# Altium PCB dl380_fan_mod.PcbDoc
Units mm, origin at the board's own origin, x right, y up, seen from the top; angles counter-clockwise.
Board outline 20 x 10 mm, 2 copper layers (Top Layer, Bottom Layer); 20 components, 15 nets, 55 pads, 36 vias.
Unrouted connection lines stored in the file: 19.
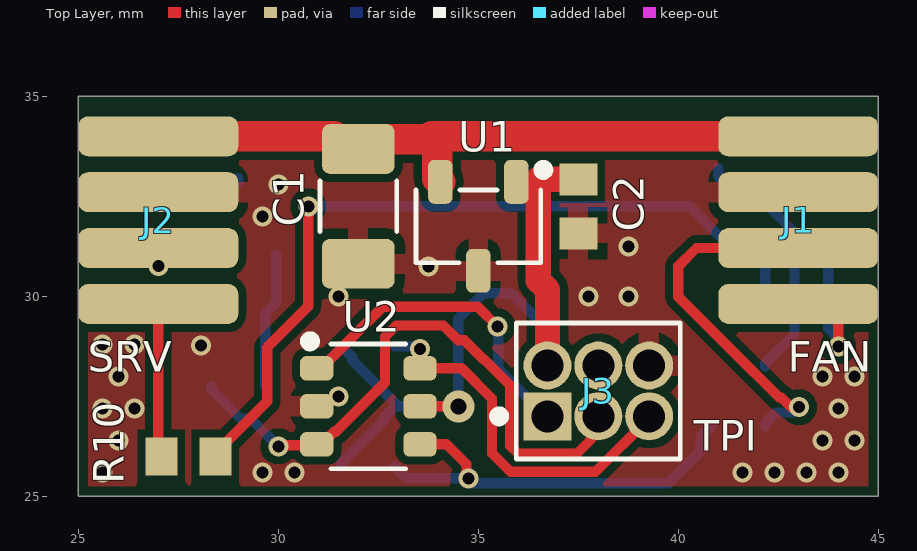
[diagram p0: Top Layer view]
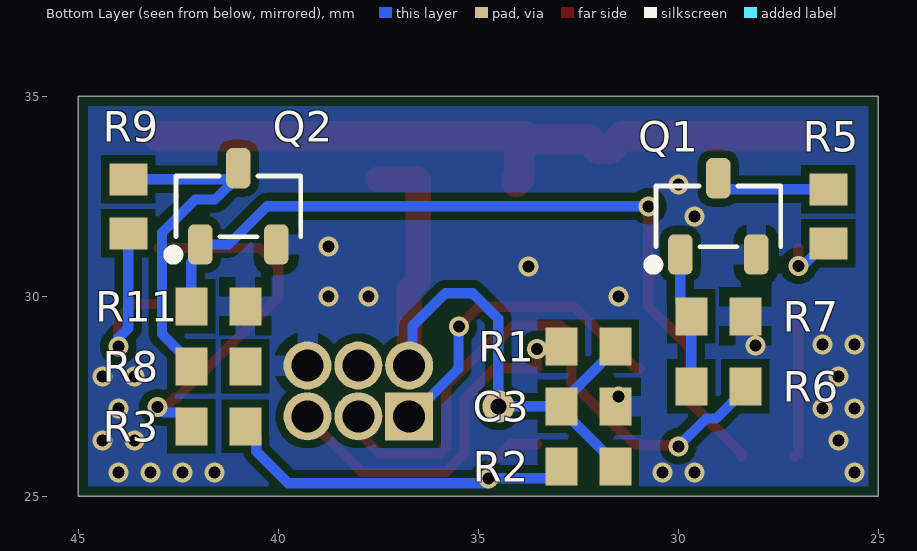
[diagram p1: Bottom Layer view, seen from below]
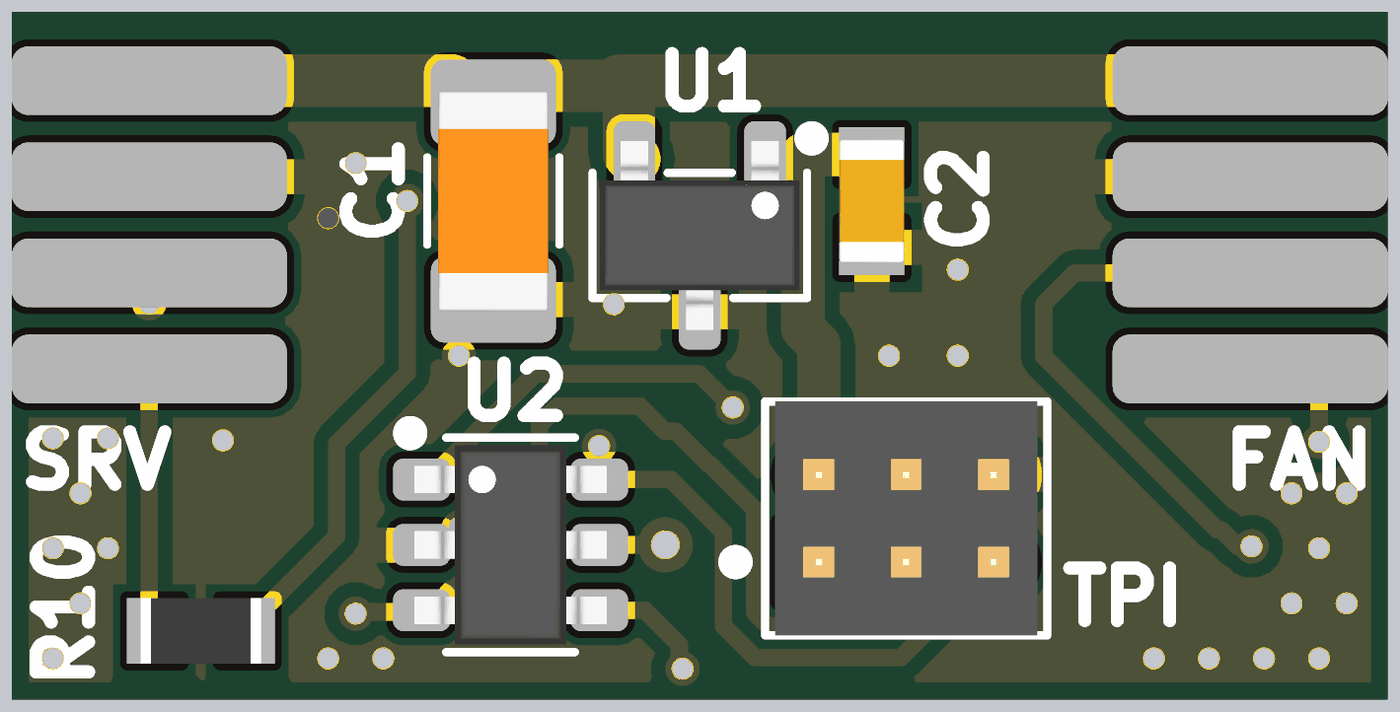
[diagram p2: 3D render of the assembled board from above, using the file's embedded part models]
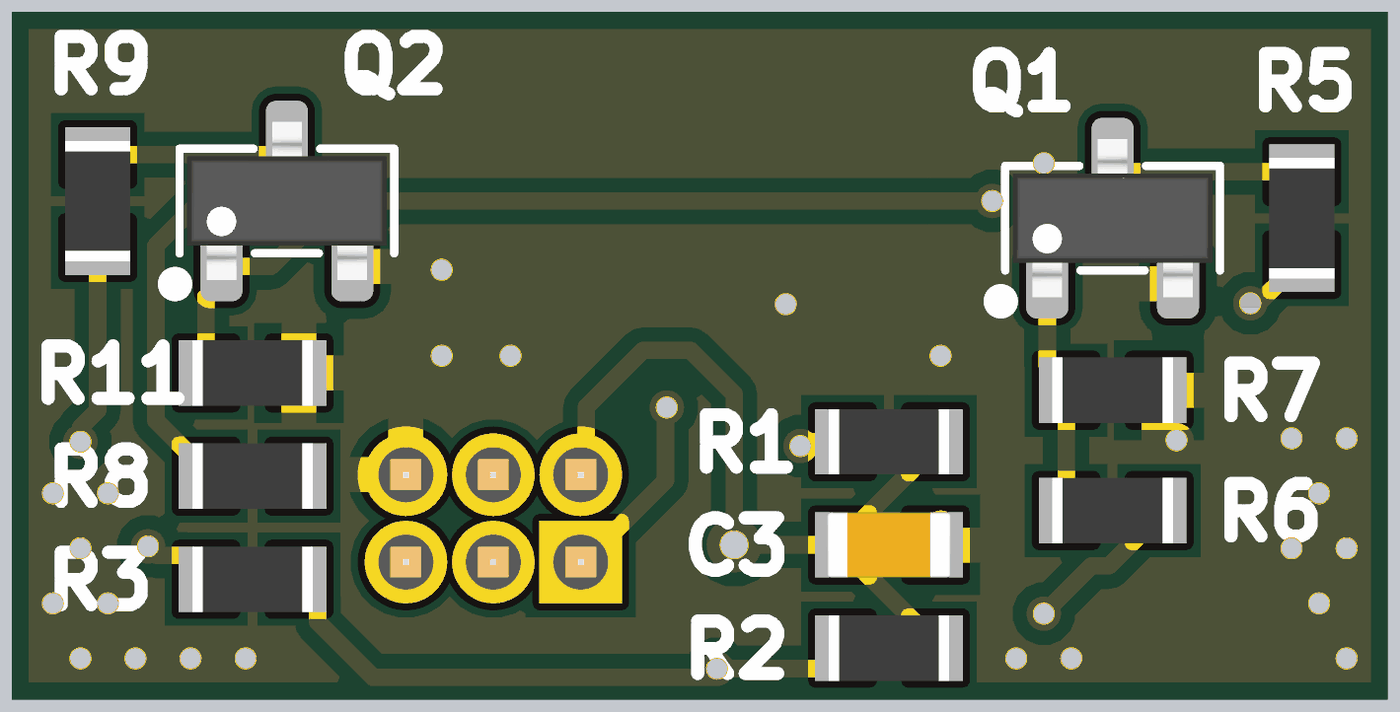
[diagram p3: 3D render of the assembled board from below, using the file's embedded part models]

## Layer stack, top to bottom
Top Solder: solder mask 0.0102, Solder Resist, Dk 3.5
Top Layer: signal copper 0.0356
Dielectric 1: dielectric 0.32, FR-4, Dk 4.8
Bottom Layer: signal copper 0.0356
Bottom Solder: solder mask 0.0102, Solder Resist, Dk 3.5

## Board outline
25,25 45,25 45,35 25,35

## Design rules (kind name [scope] priority, off if disabled: settings)
BoardOutlineClearance [All] p1: gap=0.2 ignorepadtopadclearanceinfootprint=FALSE except(0.4: Arc-SplitBarrior Arc-SplitContinuation Track-SplitBarrior Track-SplitContinuation SMDPad-SplitBarrior SMDPad-SplitContinuation THPad-SplitBarrior THPad-SplitContinuation Via-SplitBarrior Via-SplitContinuation Fill-SplitBarrior Fill-SplitContinuation Poly-SplitBarrior Poly-SplitContinuation Region-SplitBarrior Region-SplitContinuation Text-SplitBarrior Text-SplitContinuation)
Clearance "Clearance Bottom Layer" [OnLayer('Bottom Layer')] p1: gap=0.203 ignorepadtopadclearanceinfootprint=TRUE except(0.254: Arc-Text Track-Text SMDPad-Text THPad-Text Via-Text Fill-Text Poly-Text Region-Text Text-Text)
Clearance "Clearance Top Layer" [OnLayer('Top Layer')] p2: gap=0.203 ignorepadtopadclearanceinfootprint=TRUE except(0.254: Arc-Text Track-Text SMDPad-Text THPad-Text Via-Text Fill-Text Poly-Text Region-Text Text-Text)
Clearance [All] p3: gap=0.2 ignorepadtopadclearanceinfootprint=FALSE except(0.089: Arc-Arc Arc-Track Arc-SMDPad Track-Track Track-SMDPad SMDPad-SMDPad; 0.127: Arc-Via Track-Via SMDPad-Via THPad-Via Via-Via; 0.254: Arc-Text Track-Text SMDPad-Text THPad-Text Via-Text Fill-Text Poly-Text Region-Text Text-Text)
HoleSize [All] p1: absolutevalues=TRUE maxlimit=6.3 minlimit=0.2 maxpercent=80.000 minpercent=20.000
MinimumAnnularRing [All] p1: minimumring=0.076
MinimumSolderMaskSliver [All] p1: minsoldermaskwidth=0.1
PolygonConnect PolygonConnect_1 [All] p1: thpad.connectstyle=Relief thpad.reliefconductorwidth=0.508 thpad.reliefentries=4 thpad.polygonreliefangle="90 Angle" thpad.airgapwidth=0.254 smdpad.connectstyle=Relief smdpad.reliefconductorwidth=0.508 smdpad.reliefentries=4 smdpad.polygonreliefangle="90 Angle" smdpad.airgapwidth=0.254 via.connectstyle=Direct via.reliefconductorwidth=0.508 via.reliefentries=4 via.polygonreliefangle="90 Angle" via.airgapwidth=0.254
RoutingCorners [All] p1: cornerstyle=Round minsetback=2.54 maxsetback=2.54
RoutingVias [All] p1: holewidth=0.5 width=1 viastyle="Through Hole" minholewidth=0.2 minwidth=0.45 maxholewidth=1 maxwidth=2
SilkToSilkClearance [All] p1: silktosilkclearance=0.1
SilkToSolderMaskClearance [IsPad] p1: minsilkscreentomaskgap=0.1 clearancetoexposedcopper=TRUE
SolderMaskExpansion SolderMaskExpansion_Via [IsVia] p1: expansion=0.102 istentingtop=TRUE
SolderMaskExpansion [All] p2: expansion=0.102 istentingtop=FALSE
SupplyNets "Schematic Supply Nets_2" [InNet('+12')] p1: voltage=0.000
SupplyNets "Schematic Supply Nets_1" [InNet('GND')] p2: voltage=0.000
SupplyNets "Schematic Supply Nets" [InNet('+5')] p3: voltage=0.000
Width [All] p1: maxlimit=2.54 minlimit=0.089 preferedwidth=0.381
25 further rules are at their usual default settings.

## Components (designator, comment, footprint, x,y, rotation, side; value= is the part's Value field where it differs from the comment)
C1 "330n" CAPC320X160X180L55N 32,32.25 r90 top
C2 "100n" CAPC1608X08N 37.5,32.25 r90 top
C3 "100n" CAPC1608X08N 32.25,27.25 r0 bottom
J1 "FAN" 4x_PAD_4x1 43,34 r0 top locked
J2 "SRV" 4x_PAD_4x1 27,34 r0 top locked
J3 "TPI" HDRV6W40P127_3X2_381X340H570 36.73,27 r0 top locked
Q1 "MOSFET-N" SOT23-3P95_230X110L30X43N 29,32 r180 bottom
Q2 "MOSFET-N" SOT23-3P95_230X110L30X43N 41,32.25 r180 bottom
R1 "10k" RESC1608X06N 32.25,28.75 r180 bottom
R2 "10k" RESC1608X06N 32.25,25.75 r180 bottom
R3 "100R" RESC1608X06N 41.5,26.75 r180 bottom
R5 "100R" RESC1608X06N 26.25,32 r90 bottom
R6 "100R" RESC1608X06N 29,27.75 r180 bottom
R7 "1M0" RESC1608X06N 29,29.5 r0 bottom
R8 "10k" RESC1608X06N 41.5,28.25 r0 bottom
R9 "100R" RESC1608X06N 43.75,32.25 r90 bottom
R10 "100R" RESC1608X06N 27.75,26 r180 top
R11 "1M0" RESC1608X06N 41.5,29.75 r0 bottom
U1 "TS78L05CX" SOT23-3P95_275X135L45X40N 35,31.75 r180 top
U2 "ATTINY9-TS" SOT23-6P95_280X145L42X40N 32.25,27.25 r270 top locked

## Footprints (in the part's own frame and the unit in brackets; to place one, negate y for a bottom-side part, rotate by r counter-clockwise, add the part's x,y. Pads: shape width x height; smd on the part's side, far side on the other; paste and mask are expansions set on the pad)
4x_PAD_4x1 [mm] "4 Pads, 4x1mm"
  rrect50% 4x1 smd: 1(0,0) 2(0,-1.397) 3(0,-2.794) 4(0,-4.191)
CAPC320X160X180L55N [mm] "Capacitor, Chip; 3.20 mm L X 1.60 mm W X 1.80 mm H body"
  rrect32% 1.246x1.815 smd: 1(-1.435,0) 2(1.435,0)
  silkscreen extent -0.63,-0.96 0.63,0.96, body extent -1.6,-0.8 1.6,0.8, height 1.8
CAPC1608X08N [mm] "Chip Capacitor, 2-Leads, Body 1,60x0,80mm, IPC Medium Density"
  rect 0.8x0.95 smd: 1(-0.675,0) 2(0.675,0)
  body extent -0.9,-0.47 0.9,0.48, height 0.85
HDRV6W40P127_3X2_381X340H570 [mm] "Header, Vertical Non-Shrouded, 1.27 mm pitch; 0.45 mm lead width, 6 pin, 2 rows, 3.81 mm L X 3.40 mm W X 5.70 mm H body"
  rect 1.2x1.2 / inner round 1.2 / far side rect 1.2x1.2 hole 0.8 paste-2539.97: 1(0,0)
  round 1.2 hole 0.8 paste-2539.97: 2(0,1.27) 3(1.27,0) 4(1.27,1.27) 5(2.54,0) 6(2.54,1.27)
  silkscreen extent -1.33,-1.06 3.32,2.33, body extent -0.64,-1.06 3.17,2.33, height 5.7
RESC1608X06N [mm] "Chip Resistor, 2-Leads, Body 1,60x0,85mm, IPC Medium Density"
  rect 0.8x0.95 smd: 1(-0.675,0) 2(0.675,0)
  body extent -0.87,-0.48 0.87,0.48, height 0.55
SOT23-3P95_230X110L30X43N [mm] "Small Outline Transistor, SOT-23 Type, 0.95 mm pitch; 3 pin, 2.90 mm L X 1.30 mm W X 1.10 mm H body"
  rrect50% 0.61x1.009 smd: 1(-0.95,-0.953) 2(0.95,-0.953) 3(0,0.953)
  silkscreen extent -1.75,-1.33 1.56,0.76, body extent -1.45,-1.15 1.45,1.15, height 1.1
SOT23-3P95_275X135L45X40N [mm] "Small Outline Transistor, SOT-23 Type, 0.95 mm pitch; 3 pin, 2.90 mm L X 1.60 mm W X 1.35 mm H body"
  rrect50% 0.609x1.096 smd: 1(-0.95,-1.112) 2(0.95,-1.112) 3(0,1.112)
  silkscreen extent -1.75,-1.53 1.56,0.91, body extent -1.45,-1.38 1.45,1.38, height 1.35
SOT23-6P95_280X145L42X40N [mm] "Microchip 6ST1, Small Outline Transistor, SOT-23 Type, 0.95 mm pitch; 6 pin, 2.90 mm L X 1.625 mm W X 1.45 mm H body"
  rrect50% 0.609x0.833 smd: 1(-0.95,-1.291) 2(0,-1.291) 3(0.95,-1.291) 4(0.95,1.291) 5(0,1.291) 6(-0.95,1.291)
  silkscreen extent -1.75,-1.58 1.56,0.93, body extent -1.45,-1.4 1.45,1.4, height 1.45

## Part data
C1: library part cap_330n_1206, "Capacitor SMD 1206, 330n", Reference=cap_330n_1206
C2 C3: library part cap_100n_0603, "Capacitor SMD 0603, 100n", Reference=cap_100n_0603
J1 J2: library part 4x_PAD_4x1, "4x_PAD_4x1", Reference=4x_PAD_4x1
J3: library part HDR_2x3_50mil, "2x3 Pin Header, 50mil, 1.27mm, THT", Pin Count=6, Reference=HDR_2x3_50mil
Q1 Q2: library part PMV30UN2, "20V N-channel MOSFET, SOT-23", Manufacturer=Nexperia, Part Number=PMV30UN2, Reference=PMV30UN2
R1 R2 R8: library part res_10k_0603, "Resistor, SMD 0603, 10k, 5%", Tolerance=5%, Reference=res_10k_0603
R3 R5 R6 R9 R10: library part res_100R_0603, "Resistor, SMD 0603, 100R, 5%", Tolerance=5%, Reference=res_100R_0603
R7 R11: library part res_1M0_0603, "Resistor, SMD 0603, 1M0, 5%", Tolerance=5%, Reference=res_1M0_0603
U1: "5V, 100mA Positive Voltage Regulator", Manufacturer="Taiwan Semiconductor", Output Voltage=5V, Part Number=TS78L05CX, Reference=TS78L05CX
U2: "Low Power 8-bit ARM Microcontroller with 4 GPIO pins in SOT23-6 package", Manufacturer=Microchip, Part Number=ATTINY9-TS, Reference=ATTINY9-TS

## Via types
v1: diameter 0.5, hole 0.3, Top Layer to Bottom Layer, tented both sides, 35 vias
v2: diameter 0.8, hole 0.4, Top Layer to Bottom Layer, tented both sides, 1 vias

## Nets (pads, with @x,y where several pads share a name; then routed paths per layer and width w, separated by ;. In a path a pad name is that pad's centre, name@x,y a point inside that pad or via, vN(x,y) a via of type N, cw(c..) or ccw(c..) an arc to the next point about the centre after c; other vN are vias at no path point)
+5: C2.2 C3.2 J3.2 R1.2 R2.2 R8.1 U1.1 U2.5 | length 18.4
  Top Layer w0.254: U2.5 v2(34.5,27.25)
  Top Layer w0.635: J3.2 36.73,30.164 36.5,30.394 36.5,32.925 C2.2
  Bottom Layer w0.254: R2.2 31.575,25.825 32.652,26.902 32.652,26.977 C3.2 ; R1.2 31.848,28.477 31.848,28.402 32.925,27.325 C3.2 ; J3.2 36.65,28.35 36.65,29.251 35.823,30.078 35.135,30.078 34.5,29.442 v2(34.5,27.25) C3.2
+12: C1.2 J1.1 J2.1 U1.2 | length 17.7
  Top Layer w0.762: J2.1 31.4,34 31.715,33.685 C1.2 32.242,33.927 33.758,33.927 33.974,33.711 ; U1.2 33.974,32.938 33.974,33.711 ; J1.1 33.831,34 33.974,33.857 33.974,33.711
FAN_PWM: J1.4 R9.1 | length 4.8
  Top Layer w0.254: J1.4 43.636,29.809 44,29.445 v1(44,28.75)
  Bottom Layer w0.254: R9.1 43.75,29.202 44,28.952 v1(44,28.75)
FAN_TACH: J1.3 R3.1 | length 9.2
  Top Layer w0.254: J1.3 40.456,31.206 40,30.75 40,29.988 41.309,28.68 42.52,27.469 42.575,27.469 42.816,27.228 v1(43.017,27.228)
  Bottom Layer w0.254: R3.1 42.175,26.825 42.448,27.098 42.887,27.098 v1(43.017,27.228)
GND: C1.1 C2.1 C3.1 J1.2 J2.2 J3.6 Q1.2 Q2.2 R7.1 R11.1 U1.3 U2.2
  other v1: 25.6,25.6 29.6,25.6 30.4,25.6 41.6,25.6 42.4,25.6 43.2,25.6 44,25.6 26,26.4 43.6,26.4 44.4,26.4 25.6,27.2 26.4,27.2 44,27.2 31.5,27.5 26,28 43.6,28 44.4,28 28.071,28.771 25.6,28.8 26.4,28.8 31.5,30 37.75,30 38.75,30 33.75,30.75 38.75,31.25 29.6,32 30,32.8
NetQ1_1: Q1.1 R6.1 R7.2 | length 3.4
  Bottom Layer w0.254: R6.1 R7.2 29.675,29.575 29.95,29.85 Q1.1
NetQ1_3: Q1.3 R5.2 | length 2.9
  Bottom Layer w0.254: R5.2 28.824,32.675 29,32.851 Q1.3
NetQ2_1: Q2.1 R10.1 R11.2 | length 20.3
  Top Layer w0.254: R10.1 28.425,26.075 29.724,27.374 29.724,28.724 30.75,29.75 v1(30.75,32.25)
  Bottom Layer w0.254: v1(30.75,32.25) 40.284,32.25 41.237,31.297 41.774,31.297 41.95,31.121 41.95,31.084 42.175,30.859 R11.2
NetQ2_3: Q2.3 R8.2 R9.2 | length 8.9
  Bottom Layer w0.254: Q2.3 41,33.004 41.583,32.421 42.079,32.421 42.905,31.595 42.905,29.055 42.175,28.325 R8.2 ; Q2.3@41.176,32.925 R9.2
RESET: J3.5 R1.1 U2.6 | length 9.3
  Top Layer w0.254: v1(33.536,28.688) 33.536,28.205 U2.6 34.583,28.2 35.343,27.44 35.343,26.074 35.804,25.613 37.928,25.613 39.27,26.954 J3.5
  Bottom Layer w0.254: R1.1 33.474,28.75 v1(33.536,28.688)
SRV_PWM: J2.4 R10.2 | length 3.8
  Top Layer w0.254: J2.4 27,26.075 R10.2
SRV_STATUS: J2.3 R5.1 | length 1.4
  Top Layer w0.254: v1(27,30.762) J2.3
  Bottom Layer w0.254: R5.1 26.325,31.325 26.841,30.809 26.953,30.809 v1(27,30.762)
STATUS/TPICLK: J3.3 R6.2 U2.3 | length 15.1
  Top Layer w0.254: v1(30,26.25) 30.025,26.275 U2.3@30.959,26.275 ; U2.3 31.085,26.3 31.4,26.615 31.436,26.615 32.67,27.849 32.67,28.996 32.942,29.268 34.13,29.268 34.495,28.903 34.649,28.903 35.135,28.417 35.153,28.417 35.8,27.771 35.8,26.263 35.993,26.07 37.467,26.07 37.819,26.422 37.819,26.819 J3.3
  Bottom Layer w0.254: R6.2 28.325,27.675 29.055,26.945 29.305,26.945 v1(30,26.25)
TACH: R2.1 R3.2 U2.4 | length 10.6
  Top Layer w0.254: U2.4 34.203,26.3 34.703,25.8 34.703,25.497 v1(34.75,25.45)
  Bottom Layer w0.254: R2.1 32.925,25.723 33.198,25.45 v1(34.75,25.45) ; v1@34.75,25.327 36.075,25.327 39.75,25.327 40.552,26.129 40.552,26.477 R3.2
TPIDATA: J3.1 U2.1 | length 8.2
  Top Layer w0.254: U2.1 31.071,28.2 32.609,29.738 34.989,29.738 v1(35.479,29.247)
  Bottom Layer w0.254: v1(35.479,29.247) 35.497,29.229 35.497,28.187 36.684,27 J3.1
pads on no net: J3.4

## Polygon pours and split planes (outlines as drawn)
GND on Bottom Layer "GND_L02_P000" (solid, remove dead copper, pour order 0): 25.25,34.75 25.25,25.25 44.75,25.25 44.75,34.75
GND on Top Layer "GND_L01_P001" (solid, remove dead copper, pour order 1): 25.25,34.75 44.75,34.75 44.75,25.25 25.25,25.25

## Silkscreen, mask and mechanical layers (free items; w line width, h text height)
Mechanical 1:
  the board outline again, w0.254